# Altium PCB 3400_PCB_V1.PcbDoc
Units mil, origin at the board's own origin, x right, y up, seen from the top; angles counter-clockwise.
Board outline 4250 x 5250 mil, 2 copper layers (Top Layer, Bottom Layer); 76 components, 56 nets, 212 pads, 34 vias.
Unrouted connection lines stored in the file: 28.
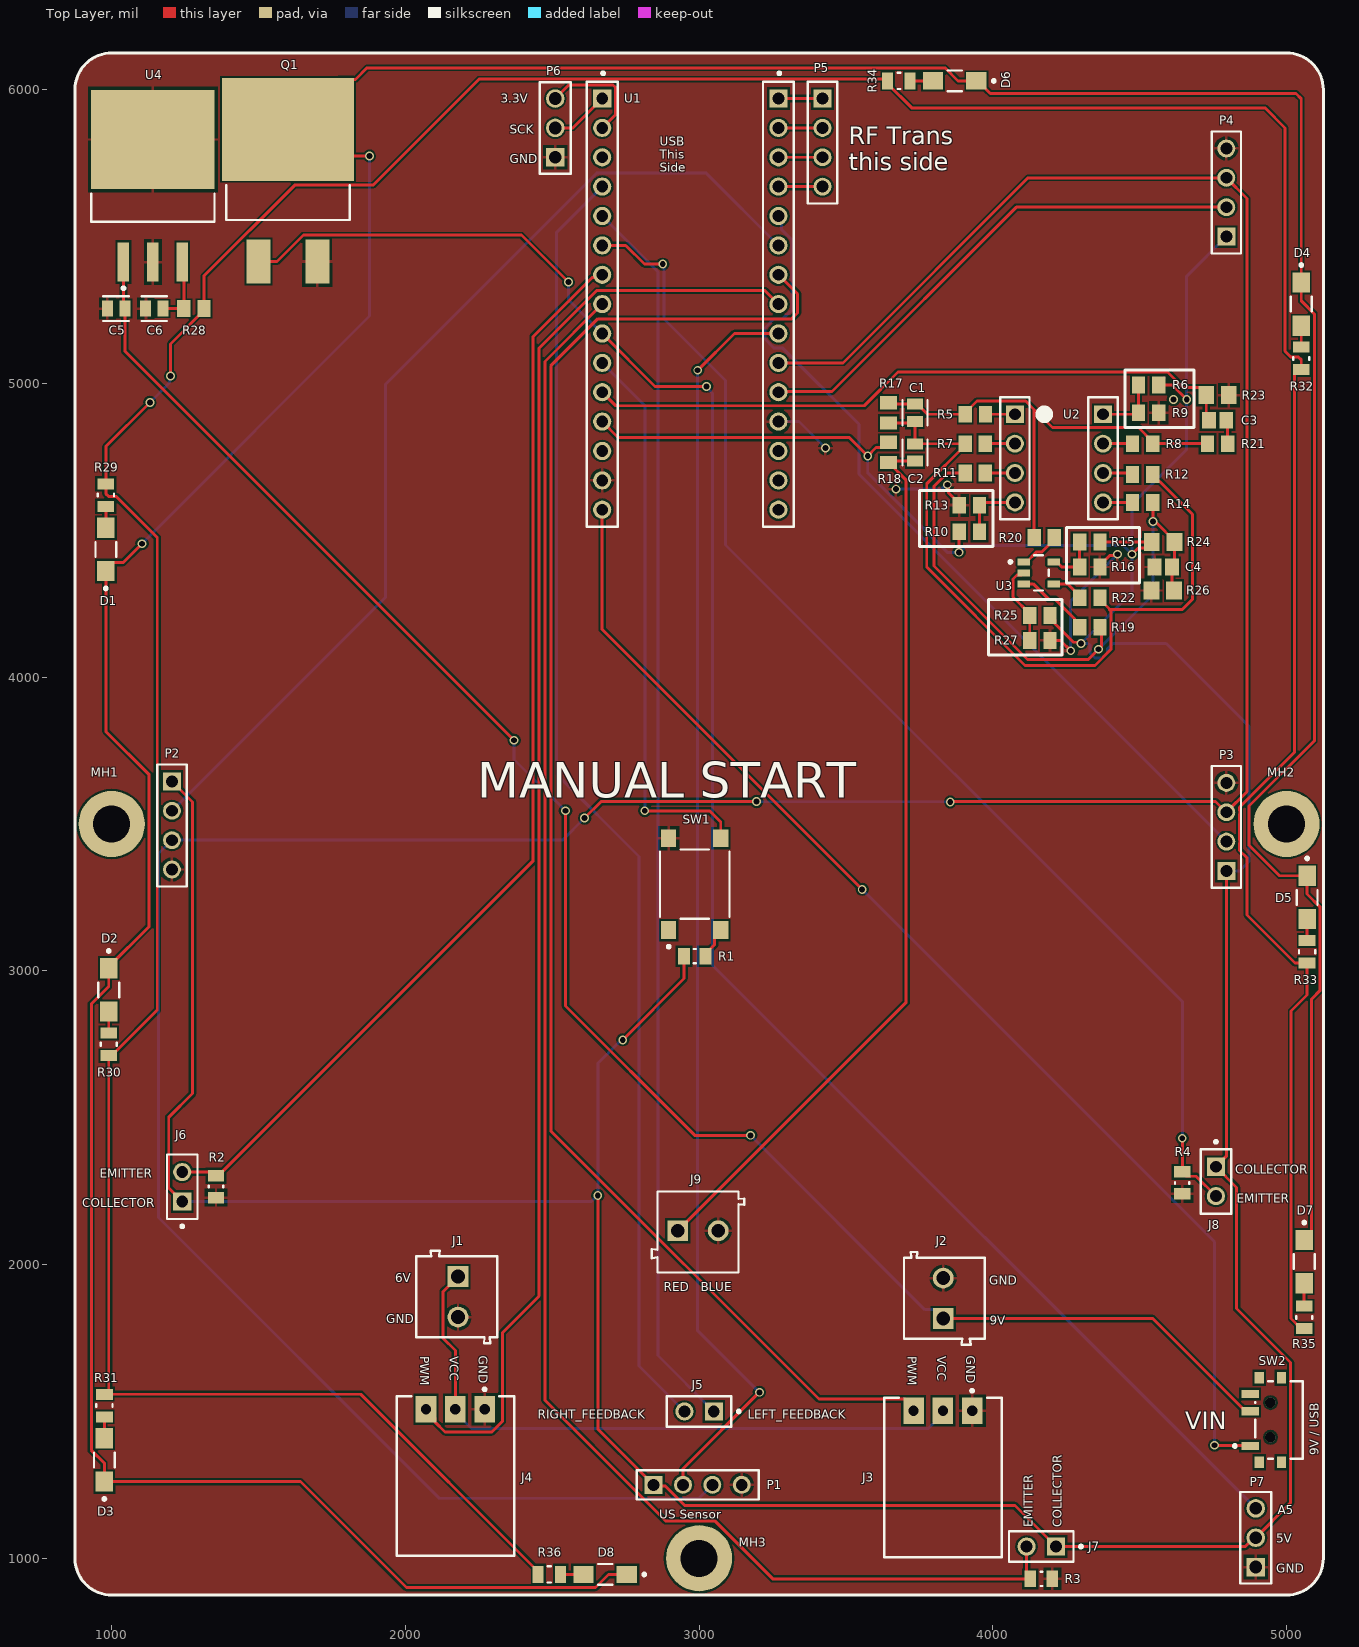
[diagram p0: Top Layer view]
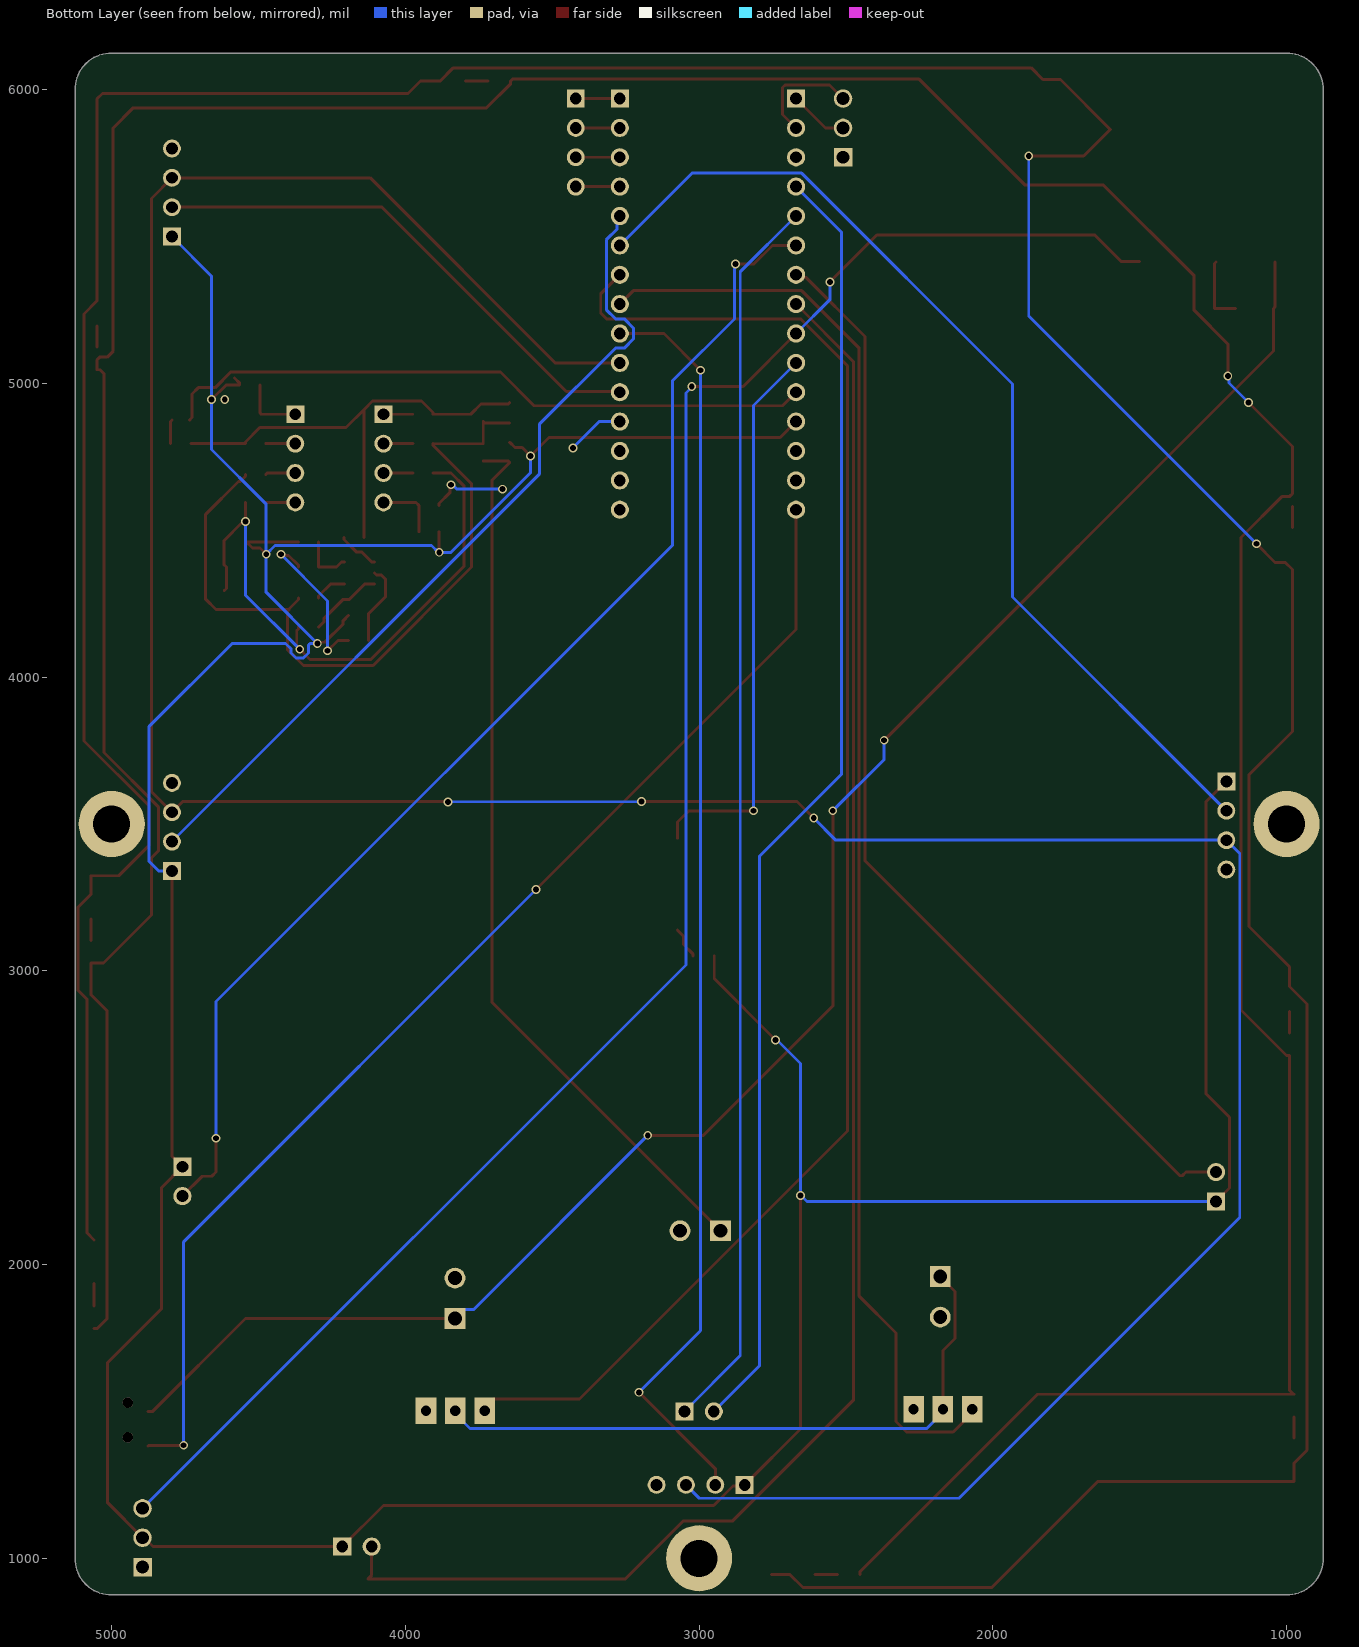
[diagram p1: Bottom Layer view, seen from below]

## Layer stack, top to bottom
Top Solder: solder mask 0.4, Solder Resist, Dk 3.5
Top Layer: signal copper 1.4
Dielectric 1: dielectric 12.6, FR-4, Dk 4.8
Bottom Layer: signal copper 1.4
Bottom Solder: solder mask 0.4, Solder Resist, Dk 3.5

## Board outline
875,1000 875,6000 cw(c1000,6000) 1000,6125 5000,6125 cw(c5000,6000) 5125,6000 5125,1000 cw(c5000,1000) 5000,875 1000,875 cw(c1000,1000)

## Design rules (kind name [scope] priority, off if disabled: settings)
Clearance [All] p1: gap=7 ignorepadtopadclearanceinfootprint=FALSE except(0: Arc-Hole Track-Hole SMDPad-Hole THPad-Hole Via-Hole Fill-Hole Poly-Hole Region-Hole Text-Hole)
HoleSize [All] p1 off: absolutevalues=TRUE maxlimit=100 minlimit=1 maxpercent=80.000 minpercent=20.000
MinimumSolderMaskSliver [All] p1 off: minsoldermaskwidth=10
PolygonConnect [All] p1: connectstyle=Relief reliefconductorwidth=10 reliefentries=4 polygonreliefangle="90 Angle" airgapwidth=10
RoutingVias [All] p1: holewidth=28 width=50 viastyle="Through Hole" minholewidth=28 minwidth=50 maxholewidth=28 maxwidth=50
SilkToSolderMaskClearance [IsPad] p1: minsilkscreentomaskgap=7 clearancetoexposedcopper=TRUE
SolderMaskExpansion [All] p1: expansion=4 istentingtop=FALSE
Width [All] p1: maxlimit=10 minlimit=10 preferedwidth=10
27 further rules are at their usual default settings.

## Classes and differential pairs
component class mic: C1 C2 C3 C4 R5 R6 R7 R8 R9 R10 R11 R12 R13 R14 R15 R16 R17 R18 R19 R20 R21 R22 R23 R24 R25 R26 R27 U2 U3
component class leds: C5 C6 D1 D2 D3 D4 D5 D6 D7 D8 Q1 R28 R29 R30 R31 R32 R33 R34 R35 R36 U4
component class ic: MH1 MH2 MH3 R1 SW1 U1
component class headers: "9V / USB" J1 J2 J3 J4 J5 J6 J7 J8 J9 P1 P2 P3 P4 P5 P6 P7 R2 R3 R4

## Components (designator, comment, footprint, x,y, rotation, side; value= is the part's Value field where it differs from the comment)
C1 "100pF" FP-C0805C-DN-MFG 3735,4900 r90 top value="100 pF"
C2 "0.22uF" FP-C0805C-DN-MFG 3735,4765 r90 top value="0.22 μF"
C3 "2.2uF" CAPC2113X140X50LL30T25 4765,4875 r0 top
C4 "2.2uF" CAPC2113X140X50LL30T25 4580,4375 r0 top
C5 "0.33uF" FP-C0805C-DN-MFG 1015,5255 r180 top value="0.33 μF"
C6 "0.1uF" FP-C0805C-DN-MFG 1145,5255 r180 top value="0.10 μF"
D1 "POWER_LED" FP-APTD3216CGCK-MFG 980,4435 r90 top value="Green LED"
D2 "POWER_LED" FP-APTD3216CGCK-MFG 990,2935 r270 top value="Green LED"
D3 "POWER_LED" FP-APTD3216CGCK-MFG 975,1335 r90 top value="Green LED"
D4 "POWER_LED" FP-APTD3216CGCK-MFG 5050,5270 r270 top value="Green LED"
D5 "POWER_LED" FP-APTD3216CGCK-MFG 5070,3250 r270 top value="Green LED"
D6 "POWER_LED" FP-APTD3216CGCK-MFG 3870,6030 r180 top value="Green LED"
D7 "POWER_LED" FP-APTD3216CGCK-MFG 5060,2010 r270 top value="Green LED"
D8 "POWER_LED" FP-APTD3216CGCK-MFG 2680,945 r180 top value="Green LED"
J1 "6V Battery" 691103110002 2175,1890 r270 top
J2 "9V Battery" 691103110002 3835,1885 r90 top
J3 "L Motor" FP-5-104935-3-MFG 3830,1275 r0 top
J4 "R Motor" FP-5-104935-3-MFG 2170,1280 r0 top
J5 "Motor Feedback" FP-M20-9990246-MFG 3000,1500 r180 top
J6 "Left Phototransistor" FP-M20-9990246-MFG 1240,2265 r90 top
J7 "Front Phototransistor" FP-M20-9990246-MFG 4165,1040 r180 top
J8 "Right Phototransistor" FP-M20-9990246-MFG 4759.49,2283.01 r270 top
J9 "Microphone" 691103110002 2996.1,2111.06 r0 top
MH1 "M3" PTH_M3 1000,3500 r0 top
MH2 "M3" PTH_M3 5000,3500 r0 top
MH3 "M3" PTH_M3 3000,1000 r0 top
P1 "Front Ultrasonic" SMTC-TSW-104-08-X-S 2845,1250 r0 top
P2 "Right Ultrasonic" SMTC-TSW-104-08-X-S 1205,3645 r270 top
P3 "Left Ultrasonic 1" SMTC-TSW-104-08-X-S 4795,3340 r90 top
P4 "Left Ultrasonic 2" SMTC-TSW-104-08-X-S 4795,5500 r90 top
P5 "RF Transceiver" SMTC-TSW-104-08-X-S 3420,5970 r270 top
P6 "RF Wires" 61300311121 2510,5870 r90 top
P7 "Extra Pins" 61300311121 4895,1070 r90 top
Q1 "IRF530NSTRLPBF" FP-PG-TO263-3-MFG 1600,5746.4 r0 top
R1 "1k" RESC2013X50X30NL20T20 2985,3050 r180 top
R2 "2.2k" FP-CRCW0805-e3-IPC_B 1355,2265 r90 top
R3 "2.2k" FP-CRCW0805-e3-IPC_B 4165,930 r180 top
R4 "2.2k" FP-CRCW0805-e3-IPC_B 4644.49,2278.01 r90 top
R5 "Jumper" RESC2013X70X40NL20T20 3940.55,4895 r0 top
R6 "Jumper" RESC2013X70X40NL20T20 4530,4995 r0 top
R7 "Jumper" RESC2013X70X40NL20T20 3940,4795 r0 top
R8 "Jumper" RESC2013X70X40NL20T20 4510,4795 r0 top
R9 "Jumper" RESC2013X70X40NL20T20 4530,4900 r0 top
R10 "Jumper" RESC2013X70X40NL20T20 3920,4495 r0 top
R11 "Jumper" RESC2013X70X40NL20T20 3940,4695 r0 top
R12 "Jumper" RESC2013X70X40NL20T20 4510,4690 r0 top
R13 "Jumper" RESC2013X70X40NL20T20 3920,4585 r0 top
R14 "Jumper" RESC2013X70X40NL20T20 4510,4595 r0 top
R15 "Jumper" RESC2013X70X40NL20T20 4330,4460 r180 top
R16 "Jumper" RESC2013X70X40NL20T20 4330,4375 r0 top
R17 "75k" RESC2013X70X40NL20T20 3645,4900 r270 top
R18 "4.02k" RESC2013X70X40NL20T20 3645,4765 r90 top
R19 "Jumper" RESC2013X70X40NL20T20 4330,4170 r180 top
R20 "Jumper" RESC2013X70X40NL20T20 4175,4475 r180 top
R21 "49.9" RESC2013X70X40NL20T20 4765,4795 r180 top
R22 "Jumper" RESC2013X70X40NL20T20 4330,4270 r180 top
R23 "100k" RESC2013X70X40ML20T20 4765,4960 r180 top
R24 "100k" RESC2013X70X40ML20T20 4580,4460 r180 top
R25 "Jumper" RESC2013X70X40NL20T20 4160,4210 r180 top
R26 "100k" RESC2013X70X40ML20T20 4578.39,4295 r0 top
R27 "Jumper" RESC2013X70X40NL20T20 4160,4125 r0 top
R28 "Jumper" RESC2013X70X40NL20T20 1280,5255 r0 top
R29 "220" FP-CRCW0805-e3-MFG 980,4620 r90 top
R30 "220" FP-CRCW0805-e3-MFG 990,2750 r270 top
R31 "220" FP-CRCW0805-e3-MFG 975,1520 r90 top
R32 "220" FP-CRCW0805-e3-MFG 5050,5085 r270 top
R33 "220" FP-CRCW0805-e3-MFG 5070,3065 r270 top
R34 "220" FP-CRCW0805-e3-MFG 3680,6030 r180 top
R35 "220" FP-CRCW0805-e3-MFG 5060,1820 r270 top
R36 "220" FP-CRCW0805-e3-MFG 2490,945 r180 top
SW1 "Manual Start Button" FP-PTS645SM43SMTR92LFS-MFG 2985,3295 r90 top
SW2 "VIN Power Toggle" FP-PCM12SMTR-MFG 4974.53,1470.94 r90 top
U1 "Arduino Nano Every" "Arduino Nano" 2670,5270 r90 top
U2 "Op Amp" "Op Amp" 4375,4895 r270 top
U3 "Op Amp" FP-DBV0005A-MFG 4156.18,4355 r0 top
U4 "5V Regulator" FP-KTT0003A-MFG 1140,5740 r0 top

## Footprints (in the part's own frame and the unit in brackets; to place one, negate y for a bottom-side part, rotate by r counter-clockwise, add the part's x,y. Pads: shape width x height; smd on the part's side, far side on the other; paste and mask are expansions set on the pad)
61300311121 [mm] "Pin Header, pitch 2.54 mm, THT, Vertical, single row, 3p"
  rect 1.6x1.6 hole 1.1: 1(-2.54,0)
  round 1.6 hole 1.1: 2(0,0) 3(2.54,0)
  silkscreen extent -3.96,-1.35 3.96,1.35, body extent -3.81,-1.27 3.81,1.27, height 8.57
691103110002 [mm] "3,50mm - modular - blue - Horizontal wire entry - Pressure clamp - 8,4mm height - 02p"
  rect 1.8x1.8 hole 1.2: 1(-1.75,0.1)
  round 1.8 hole 1.2: 2(1.75,0.1)
  silkscreen extent -4,-3.5 4,3.5, body extent -4,-3.5 4,3.5, height 8.45
"Arduino Nano" [mm]
  rect 1.57x1.57 hole 1.02 paste-1000 mask+0: 1(17.78,0) 16(17.78,-15.24)
  round 1.57 hole 1.02 paste-1000 mask+0: 2(15.24,0) 3(12.7,0) 4(10.16,0) 5(7.62,0) 6(5.08,0) 7(2.54,0) 8(0,0) 9(-2.54,0) 10(-5.08,0) 11(-7.62,0) 12(-10.16,0) 13(-12.7,0) 14(-15.24,0) 15(-17.78,0) 17(15.24,-15.24) 18(12.7,-15.24) 19(10.16,-15.24) 20(7.62,-15.24) 21(5.08,-15.24) 22(2.54,-15.24) 23(0,-15.24) 24(-2.54,-15.24) 25(-5.08,-15.24) 26(-7.62,-15.24) 27(-10.16,-15.24) 28(-12.7,-15.24) 29(-15.24,-15.24) 30(-17.78,-15.24)
  silkscreen extent -19.24,-16.58 20.08,1.34, body extent -19.34,-16.68 19.34,1.44, height 0.25
CAPC2113X140X50LL30T25 [mm] "Chip Capacitor, 2-Leads, Body 2.10x1.25mm, IPC High Density"
  rect 1.2x1.45 smd: 1(-0.75,0) 2(0.75,0)
  body extent -1.2,-0.77 1.2,0.77, height 1.4
FP-5-104935-3-MFG [mm]
  rect 1.78x2.29 hole 0.89 paste-1000 mask+0: 1(2.54,5.775) 2(0,5.775) 3(-2.54,5.775)
  silkscreen extent -5.08,-6.9 5.08,7.62, body extent -5.18,-6.99 5.18,7.02, height 0.25
FP-APTD3216CGCK-MFG [mm]
  rect 1.75x1.5 smd paste+0 mask+0: 1(-1.875,0) 2(1.875,0)
  silkscreen extent -3.5,-0.9 0.63,0.9, body extent -2.85,-1 2.85,1, height 0.25
FP-C0805C-DN-MFG [mm]
  rect 0.95x1.35 smd paste+0 mask+0: 1(-0.75,0) 2(0.75,0)
  silkscreen extent -1.1,-1.07 1.1,1.07, body extent -1.4,-0.85 1.4,0.85, height 0.25
FP-CRCW0805-e3-IPC_B [mil]
  rect 39.63x55.44 smd paste+0 mask+0: 1(-37.44,0) 2(37.44,0)
  silkscreen extent -3,-25 3,25, body extent -67,-38 67,38, height 10
FP-CRCW0805-e3-MFG [mm]
  rect 0.95x1.45 smd paste+0 mask+0: 1(-0.975,0) 2(0.975,0)
  silkscreen extent -0.13,-0.7 0.13,0.7, body extent -1.55,-0.82 1.55,0.82, height 0.25
FP-DBV0005A-MFG [mm]
  rrect17% 1.1x0.6 smd paste+0 mask+0: 1(-1.3,0.95) 2(-1.3,0) 3(-1.3,-0.95) 4(1.3,-0.95) 5(1.3,0.95)
  silkscreen extent -2.57,-1.53 0.87,1.53, body extent -1.95,-1.78 1.95,1.78, height 0.25
FP-KTT0003A-MFG [mm]
  rect 1x3.4 smd paste-1000 mask+0: 1(-2.54,-8.303) 2(0,-8.303) 3(2.54,-8.303)
  rect 10.7x8.6 smd paste-1000 mask+0: 4(0,2.298)
  silkscreen extent -5.34,-10.69 5.34,-2.38, body extent -5.45,-10.1 5.45,6.7, height 0.25
FP-M20-9990246-MFG [mm]
  rect 1.57x1.57 hole 1.02 paste-1000 mask+0: 1(-1.27,0)
  round 1.57 hole 1.02 paste-1000 mask+0: 2(1.27,0)
  silkscreen extent -3.55,-1.32 2.79,1.32, body extent -2.89,-1.42 2.89,1.42, height 0.25
FP-PCM12SMTR-MFG [mm]
  rect 0.7x1.5 smd paste+0 mask+0: 1(-2.25,2.5) 2(0.75,2.5) 3(2.25,2.5)
  rect 1x0.8 smd paste+0 mask+0: 4(-3.65,1.715) 5(3.65,1.715) 6(-3.65,-0.215) 7(3.65,-0.215)
  round 0.9 hole 0.9 unplated paste-1000 mask+0: ""(-1.5,0.75) ""(1.5,0.75)
  silkscreen extent -3.35,-2.05 3.35,3.95, body extent -4.25,-2.15 4.25,3.35, height 0.25
FP-PG-TO263-3-MFG [mm]
  rect 2.08x3.81 smd paste+0 mask+0: 1(-2.54,-8.417) 3(2.54,-8.417)
  rect 11.43x8.89 smd paste+0 mask+0: 4(0,3.013)
  silkscreen extent -5.34,-4.82 5.34,-1.81, body extent -5.81,-10.42 5.81,7.56, height 0.25
FP-PTS645SM43SMTR92LFS-MFG [mm]
  rect 1.55x1.3 smd paste+0 mask+0: 1(-3.975,2.25) 2(3.975,2.25) 3(-3.975,-2.25) 4(3.975,-2.25)
  silkscreen extent -5.52,-3 3,3, body extent -4.85,-3.1 4.85,3.1, height 0.25
"Op Amp" [mm] ".025 SQ Post Terminal Strip Assembly, 1x4 Pins, Vertical, 2.54mm Pitch, Male"
  rect 1.55x1.55 hole 1.02: 1(0,-7.62) 5(0,0)
  round 1.55 hole 1.02: 2(2.54,-7.62) 3(5.08,-7.62) 4(7.62,-7.62) 6(2.54,0) 7(5.08,0) 8(7.62,0)
  silkscreen extent -1.46,-8.89 9.08,1.27, body extent -1.27,-8.89 8.89,1.27, height 8.38
PTH_M3 [mm] "Plated Through Hole, M3"
  round 5.715 hole 3.2 paste+0: ""(0,0)
RESC2013X50X30NL20T20 [mm] "Chip Resistor, 2-Leads, Body 2.00x1.25mm, IPC Medium Density"
  rect 1.05x1.45 smd: 1(-0.925,0) 2(0.925,0)
  silkscreen extent -0.1,-0.63 0.1,0.63, body extent -1.1,-0.72 1.1,0.72, height 0.5
RESC2013X70X40ML20T20 [mm] "Chip Resistor, 2-Leads, Body 2.00x1.25mm, IPC Low Density"
  rect 1.35x1.55 smd: 1(-0.975,0) 2(0.975,0)
  body extent -1.1,-0.72 1.1,0.72, height 0.7
RESC2013X70X40NL20T20 [mm] "Chip Resistor, 2-Leads, Body 2.00x1.25mm, IPC Medium Density"
  rect 1.15x1.45 smd: 1(-0.875,0) 2(0.875,0)
  body extent -1.1,-0.72 1.1,0.72, height 0.7
SMTC-TSW-104-08-X-S [mm] ".025 SQ Post Terminal Strip Assembly, 1x4 Pins, Vertical, 2.54mm Pitch, Male"
  rect 1.55x1.55 hole 1.02: 1(0,0)
  round 1.55 hole 1.02: 2(2.54,0) 3(5.08,0) 4(7.62,0)
  silkscreen extent -1.46,-1.27 9.08,1.27, body extent -1.27,-1.27 8.89,1.27, height 8.38

## Part data
C1: library part CMP-03020-013647-1, "CAP CER 100PF 50V C0G/NP0 0805", Capacitance="100 pF", Manufacturer=KEMET, Manufacturer Part Number=C0805C101J5GACTU, Package=C0805C-DN, Temperature="-55°C to +125°C", Temperature Characteristic=C0G, Temperature Coefficient=30ppm/°C, Temperature Range High=+125°C, Temperature Range Low=-55°C, Tolerance=0.05, Voltage Rating="50 V", Automotive=No, Category=Cap, ComponentLink2Description=Datasheet, ComponentLink2URL=https://content.kemet.com/datasheets/KEM_C1003_C0G_SMD.pdf, Device Class L1="Passive Components", Device Class L2=Capacitors, Device Class L3="Ceramic Capacitors", Digikey Description="CAP CER 100PF 50V C0G/NP0 0805", Height=0.88mm, Ipc Land Pattern Name=CAPC200125X78, Lead Free=Yes, Material=Ceramic, MPN=C0805C101J5GACTU, Octopart=https://octopart.com/c0805c101j5gactu-kemet-100795, RoHS=TRUE
C2: library part CMP-1036-04552-2, "CAP CER 0.22UF 50V X7R 0805", Capacitance="0.22 μF", Manufacturer=KEMET, Manufacturer Part Number=C0805C224K5RACTU, Package=C0805C-DN, Temperature="-55°C to +125°C", Temperature Characteristic=X7R, Temperature Coefficient=30ppm/°C, Temperature Range High=+125°C, Temperature Range Low=-55°C, Tolerance=0.1, Voltage Rating="50 V", Automotive=No, Category=Cap, ComponentLink2Description=Datasheet, ComponentLink2URL=https://content.kemet.com/datasheets/KEM_C1003_C0G_SMD.pdf, Device Class L1="Passive Components", Device Class L2=Capacitors, Device Class L3="Ceramic Capacitors", Digikey Description="CAP CER 0.22UF 50V X7R 0805", Height=0.88mm, Ipc Land Pattern Name=CAPC200125X78, Lead Free=Yes, Material=Ceramic, Mouser Description="CAP CER 0.22UF 50V X7R 0805", MPN=C0805C224K5RACTU, Octopart=https://octopart.com/c0805c224k5ractu-kemet-144670, RoHS=TRUE
C3 C4: library part CMP-2007-00007-1, Manufacturer=Kemet, MPN=C0805C225K8RACTU, Part Number=C0805C225K8RACTU
C5: library part CMP-1036-04607-3, "CAP CER 0.33UF 50V X7R 0805", Capacitance="0.33 μF", Manufacturer=KEMET, Manufacturer Part Number=C0805C334K5RACTU, Package=C0805C-DN, Temperature="-55°C to +125°C", Temperature Characteristic=X7R, Temperature Coefficient=30ppm/°C, Temperature Range High=+125°C, Temperature Range Low=-55°C, Tolerance=0.1, Voltage Rating="50 V", Automotive=No, Category=Cap, ComponentLink2Description=Datasheet, ComponentLink2URL=https://content.kemet.com/datasheets/KEM_C1003_C0G_SMD.pdf, Device Class L1="Passive Components", Device Class L2=Capacitors, Device Class L3="Ceramic Capacitors", Digikey Description="CAP CER 0.33UF 50V X7R 0805", Height=0.88mm, Ipc Land Pattern Name=CAPC200125X78, Lead Free=Yes, Material=Ceramic, Mouser Description="Multilayer Ceramic Capacitors MLCC - SMD/SMT 50volts 0.33uF 10% X7R", MPN=C0805C334K5RACTU, Octopart=https://octopart.com/c0805c334k5ractu-kemet-10475704, RoHS=TRUE
C6: library part CMP-2007-00279-2, "CAP CER 0.1UF 50V X7R 0805", Capacitance="0.10 μF", Manufacturer=KEMET, Manufacturer Part Number=C0805C104K5RACTU, Package=C0805C-DN, Temperature="-55°C to +125°C", Temperature Characteristic=X7R, Temperature Coefficient=30ppm/°C, Temperature Range High=+125°C, Temperature Range Low=-55°C, Tolerance=0.1, Voltage Rating="50 V", Automotive=No, Category=Cap, ComponentLink2Description=Datasheet, ComponentLink2URL=https://content.kemet.com/datasheets/KEM_C1003_C0G_SMD.pdf, Device Class L1="Passive Components", Device Class L2=Capacitors, Device Class L3="Ceramic Capacitors", Digikey Description="CAP CER 0.1UF 50V X7R 0805", Height=0.88mm, Ipc Land Pattern Name=CAPC200125X78, Lead Free=Yes, Material=Ceramic, Mouser Description="Cap Ceramic 0.1uF 50V X7R 10% SMD 2.0 x 1.2 mm 125 C Paper T/R", MPN=C0805C104K5RACTU, Octopart=https://octopart.com/c0805c104k5ractu-kemet-143926, RoHS=TRUE
D1 D2 D3 D4 D5 D6 D7 D8: library part CMP-2000-05792-2, "LED GREEN CLEAR 2SMD", Case Code (Imperial)=1206, Case Code (Metric)=3216, Color=Green, Forward Current=20mA, Forward Voltage=2.1V, Lens Color=Clear, Max Operating Temperature=85°C, Min Operating Temperature=-40°C, MPN=APTD3216CGCK, Package Quantity=2000, Case/Package=1206, Dominant Wavelength=570nm, Height=1.8mm, Illumination Color=Green, Lead Free="Lead Free", Length=3.2mm, Lens Style=Clear, Luminous Intensity=300mcd, Mount="Surface Mount", Number of LEDs=1, Number of Pins=2, Packaging="Tape and Reel", Test Current=20mA, Viewing Angle=50°, Width=1.6mm
J1 J2 J9: library part CMP-1502-03254-1, "Series 1031 - 3.50 mm Horizontal Entry Modular with Pressure Clamp WR-TBL, 2 pin", Manufacturer="Wurth Elektronik", MPN=691103110002, Operating Temperature=-40to105degC, Datasheet URL=http://katalog.we-online.de/em/datasheet/6911031100xx.pdf, Manufacturer URL=http://www.we-online.de, Mounting Technology=THT, Package Reference=691103110002, Packaging=Box, Part Number=691103110002, Pin Number=2, Pitch=3.50mm, Publisher=WurthElektronik
J3 J4: library part CMP-03369-000121-1, "CONN HEADER R/A 3POS 2.54MM", Color=Black, Contact Current Rating=3A, Contact Resistance=15mR, Flammability Rating="UL94 V-0", Insulation Resistance=5GR, Max Operating Temperature=105°C, Max Voltage Rating (AC)=30V, Min Operating Temperature=-65°C, MPN=5-104935-3, Package Quantity=52, Approvals=CSA, Backwall/Post Interruptions="No (Without)", Connector Type=Plug, Contact Gender=Male, Contact Material=Brass, Contact Mating Length=0.23inch, Contact Plating=Gold, Contact Retention="Yes (With)", Contact Shape=Square, Contact Type="Male Pin", Current Rating=3A, Depth=13.59mm, ELV=Compliant, Gender=Male, Height=13.59mm, Housing Color=Black, Housing Material=Thermoplastic, Lead Free="Lead Free", Length=0.4inch, Mating Alignment="Yes (With)", Mating Retention="Yes (With)", Mount="Through Hole", Number of Contacts=3, Number of Positions=3, Number of Rows=1, Orientation="Right Angle", Packaging=Rail/Tube, PCB Mount Alignment="No (Without)", PCB Mount Retention=Without, PCB Mounting Orientation="Right Angle", PCB Thickness=0.062inch, Pitch=2.54mm, Radiation Hardening=No, RoHS Compliant=Yes, Row Spacing=0.1inch, Series="AMPMODU MTE", Strain Relief="No (Without)", Tail Length=3.3mm, Termination=Crimp
J5 J6 J7 J8: library part CMP-15831-000009-1, "CONN HEADER VERT 2POS 2.54MM", Current Rating=3A, Manufacturer=Harwin, Manufacturer Part Number=M20-9990246, Temperature="-40°C to +105°C", Temperature Range High=+105°C, Temperature Range Low=-40°C, Automotive=No, Category=Conn, ComponentLink2Description=Datasheet, ComponentLink2URL=https://cdn.harwin.com/pdfs/M20-999.pdf, Conn Gender=Male, Conn Orientation=Vertical, Contact Material=Tin,Nickel, Device Class L1=Connectors, Device Class L2="Headers and Wire Housings", Device Class L3=unset, Digikey Description="CONN HEADER VERT 2POS 2.54MM", Height=8.99mm, Lead Free=Yes, Mouser Description="2.54mm (0.1\") Pitch SIL Vertical PC Tail Pin Header, 6.1mm mating pin height, tin, 2 contacts", Number of Contacts=2, Number of Rows=1, Octopart=https://octopart.com/m20-9990246-harwin-2590635, Package=M20-9990246, Pitch=2.54mm, RoHS=TRUE
MH1 MH2 MH3: library part PTH, "M3 Plated Through Hole"
P1 P2 P3 P4 P5: library part CMP-1024-00355-1, "0.025\" SQ Post Header, Through-hole, Vertical, -55 to 125 degC, 2.54 mm Pitch, 4-Pin, Male, RoHS", Manufacturer=Samtec, PartNumber=TSW-104-08-F-S, Temperature Range="-55 to 125 degC", ComponentLink1Description="Manufacturer URL", ComponentLink1URL=http://www.samtec.com, ComponentLink2Description=Datasheet, ComponentLink2URL=http://www.samtec.com/documents/webfiles/pdf/TSW_TH.PDF, ComponentLink3Description="Package Specification", ComponentLink3URL=http://www.samtec.com/documents/webfiles/cpdf/TSW-XXX-XX-XXX-X-XX-XXX-MKT.pdf, DatasheetVersion=F-214, Mounting Technology=Through-hole, Orientation=Vertical, PackageDescription=".025[0.64] SQ. Post Terminal Strip Assembly", PackageReference=TSW-104-08-X-S, PackageVersion="DM, 8/1988", Pitch="2.54 mm", RoHS=True
P6 P7: library part CMP-1502-01062-1, "THT Vertical Pin Header WR-PHD, Pitch 2.54 mm, Single Row, 3 pins", Contact Resistance=20mOhm, Manufacturer="Wurth Elektronik", Operating Temperature=-40to105degC, Package Reference=61300311121, Rated Current=3A, Withstanding Voltage=500VAC, Working Voltage=250VAC, Datasheet URL=https://katalog.we-online.de/em/datasheet/6130xx11121.pdf, Gender=Male, Manufacturer URL=http://www.we-online.de, Mounting Technology=THT, Orientation=Vertical, Packaging=Bag, Part Number=61300311121, Pin Number=3, Pitch=2.54mm, Publisher=WurthElektronik, Row Number=Single
Q1: library part CMP-32901-000039-1, "MOSFET N-CH 100V 17A D2PAK", Continuous Drain Current=17A, Drain To Source Breakdown Voltage=100V, Drain To Source Resistance=90mΩ, Gate To Source Voltage=20V, Input Capacitace At Vds="920pF @ 25V", Manufacturer=Infineon, Max Forward Diode Voltage=1.3V, Max Junction Temp=+175°C, Package=PG-TO263-3, Power Dissipation=3.8W, Pulse Drain Current=60A, Temperature="-55°C to +175°C", Temperature Range Low=-55°C, Automotive=No, Category=Trans, ComponentLink2Description=Datasheet, ComponentLink2URL=https://www.infineon.com/dgdl/irf530nspbf.pdf?fileId=5546d462533600a4015355e38eb4199c, Depletion Mode=False, Device Class L1="Discrete Semiconductors", Device Class L2=Transistors, Device Class L3=MOSFETs, Digikey Description="MOSFET N-CH 100V 17A D2PAK", Drain To Source Voltage=100V, Footprint Url=https://www.infineon.com/cms/en/product/packages/PG-TO263/PG-TO263-3-901/, Gate Charge At Vgs="37nC @ 10V", Height=5.084mm, Lead Free=Yes, Manufacturer Part Number=IRF530NSTRLPBF, Number Of Channels=1, Number Of N Channels=1, Octopart=https://octopart.com/irf530nstrlpbf-infineon-65873402, Reverse Recovery Charge=320nC, Reverse Recovery Time=93ns, RoHS=TRUE, Rthja Max=40°C/W, Standoff Height=0mm, Temperature Range High=+175°C, Threshold Vgs Max=4V, Threshold Vgs Min=2V, Turn Off Delay Time=35ns, Turn On Delay Time=9.2ns
R1: library part CMP-1013-00510-2, Manufacturer="Vishay Dale", MPN=CRCW08051K00FKEA, Part Number=CRCW08051K00FKEA
R2 R3 R4: library part CMP-2001-03760-2, "RES Thick Film, 2.2kΩ, 1%, 0.125W, 100ppm/°C, 0805", Case Code (Imperial)=0805, Case Code (Metric)=2012, Max Operating Temperature=155°C, Max Power Dissipation=125mW, Min Operating Temperature=-55°C, MPN=CRCW08052K20FKEA, Package Quantity=10, Resistance=2.2kR, Temperature Coefficient=100ppm/°C, Tolerance=1%, Voltage Rating=150V, Case/Package=0805, Composition="Thick Film", Contact Plating=Tin, Depth=1.25mm, Features="Automotive AEC-Q200", Height=0.45mm, Lead Free="Lead Free", Length=2mm, Military Standard=Not, Number of Terminations=2, Packaging="Tape and Reel", Power Rating=125mW, Radiation Hardening=No, Termination=SMD/SMT, Voltage Rating (DC)=150V, Weight=0.000194oz, Width=1.25mm
R5 R6 R7 R8 R9 R10 R11 R12 R13 R14 R15 R16 R19 R20 R22 R25 R27 R28: library part CMP-1665-00002-5, "Chip Resistor, 0 Ohm, +/- 1%, 0.125 W, -55 to 155 degC, 0805 (2012 Metric), RoHS, Tape and Reel", Case Code (Imperial)=0805, Case Code (Metric)=2012, Max Operating Temperature="155 degC", Min Operating Temperature="-55 degC", MPN=ERJ-6GEY0R00V, Package Quantity=5000, Resistance="0 Ohm", Tolerance=5%, Case/Package=0805, ComponentLink1Description="Manufacturer URL", ComponentLink1URL=http://www.panasonic.com/, ComponentLink2Description=Datasheet, ComponentLink2URL=http://industrial.panasonic.com/cdbs/www-data/pdf/RDA0000/AOA0000C84.pdf, DatasheetVersion=03/2015, Height="0.6 mm", Length="2 mm", Mounting Technology="Surface Mount", PackageDescription="2-Pin Surface Mount Device, Body 2 x 1.25 mm", Packaging="Tape and Reel", PartNumber=ERJ-6GEY0R00V, Radiation Hardening=No, REACH SVHC="No SVHC", RoHSCompliant=True, Width="1.25 mm"
R17: library part CMP-2001-00290-1, Manufacturer=Panasonic, MPN=ERJ-6ENF7502V, Part Number=ERJ-6ENF7502V
R18: library part CMP-2001-00168-1, Manufacturer=Panasonic, MPN=ERJ-6ENF4021V, Part Number=ERJ-6ENF4021V
R21: library part CMP-2001-00215-1, Manufacturer=Panasonic, MPN=ERJ-6ENF49R9V, Part Number=ERJ-6ENF49R9V
R23 R24 R26: library part CMP-2001-04377-1, Manufacturer=Panasonic, MPN=ERJ-6ENF1003V, Part Number=ERJ-6ENF1003V
R29 R30 R31 R32 R33 R34 R35 R36: library part CMP-2001-03682-2, "RES Thick Film, 220Ω, 1%, 0.125W, 100ppm/°C, 0805", Case Code (Imperial)=0805, Case Code (Metric)=2012, Max Operating Temperature=155°C, Max Power Dissipation=125mW, Min Operating Temperature=-55°C, MPN=CRCW0805220RFKEA, Package Quantity=10, Resistance=220R, Temperature Coefficient=100ppm/°C, Tolerance=1%, Voltage Rating=150V, Case/Package=0805, Composition="Thick Film", Contact Plating=Tin, Depth=1.25mm, Features="Automotive AEC-Q200", Height=0.45mm, Lead Free="Lead Free", Length=2mm, Military Standard=Not, Mount="Surface Mount", Number of Terminations=2, Packaging="Tape and Reel", Power Rating=125mW, Radiation Hardening=No, Termination=SMD/SMT, Voltage Rating (DC)=150V, Weight=0.000194oz, Width=0.049inch
SW1: library part CMP-2000-05160-2, "SWITCH TACTILE SPST-NO 0.05A 12V", Case/Package=SMD/SMT, Color=Black, Contact Resistance=100mR, Current Rating=50mA, Max Operating Temperature=60°C, Max Voltage Rating (DC)=12V, Min Operating Temperature=-20°C, MPN=PTS645SM43SMTR92LFS, Operating Force=160gf, Package Quantity=1, Actuator Length=0.85mm, Actuator Material=Nylon, Actuator Type=Standard, Contact Material=Silver, Contact Plating=Silver, Depth=9mm, Illumination Type=Non-Illuminated, Lead Free="Lead Free", Length=6mm, Max Current Rating=50mA, Mechanical Life=100000Cycles, Mount="Surface Mount", Orientation=Straight, Packaging="Tape and Reel", REACH SVHC="No SVHC", Switch Function=Off-Mom, Termination="Gull Wing", Throw Configuration=SPST, Voltage Rating (DC)=12V
SW2: library part CMP-2000-06884-2, "SWITCH SLIDE SPDT 300MA 6V", Contact Current Rating=300mA, Contact Resistance=70mR, Insulation Resistance=100mR, Max Operating Temperature=85°C, Max Voltage Rating (DC)=6V, Min Operating Temperature=-20°C, MPN=PCM12SMTR, Package Quantity=1, Actuator Length=1.5mm, Actuator Material=Nylon, Actuator Type=Standard, Contact Material="Copper Alloy", Contact Plating=Silver, Current Rating=300mA, Depth=5mm, Lead Free="Lead Free", Length=7.7mm, Max Current Rating=300mA, Mechanical Life=10000Cycles, Mount="Surface Mount", Orientation="Right Angle", Packaging="Tape and Reel", REACH SVHC="No SVHC", Switch Function=On-On, Switch Travel=1.5mm, Termination="Gull Wing", Throw Configuration=SPDT, Voltage Rating (AC)=6V, Voltage Rating (DC)=6V, Width=6.7mm
U1: library part "Arduino Mount"
U3: library part CMP-04893-000008-1, "IC OPAMP GP 1 CIRCUIT SOT23-5", Case/Package=SOT-23-5, Input Bias Current=8pA, Input Offset Voltage (Vos)=200uV, Max Dual Supply Voltage=18V, Max Operating Temperature=125°C, Max Supply Voltage=36V, Min Dual Supply Voltage=2.25V, Min Operating Temperature=-40°C, Min Supply Voltage=4.5V, MPN=OPA172IDBVT, Operating Supply Current=1.6mA, Output Current per Channel=75mA, Voltage Gain=130dB, Bandwidth=10MHz, Common Mode Rejection Ratio=90dB, Gain Bandwidth Product=10MHz, Lead Free="Lead Free", Mount="Surface Mount", Number of Amplifiers=1, Number Of Channels=1, Number of Circuits=1, Number of Pins=5, Packaging="Cut Tape", REACH SVHC="No SVHC", RoHS Compliant=Yes, Slew Rate=10V/µs
U4: library part CMP-1685-00014-2, "IC REG LIN 5V 1.5A DDPAK/TO263-3", Case/Package=TO-263, Dropout Voltage=2V, Max Input Voltage=25V, Max Operating Temperature=125°C, Max Output Current=1.5A, Max Output Voltage=5.2V, Min Input Voltage=7V, Min Operating Temperature=0°C, Min Output Voltage=4.8V, MPN=UA7805CKTTR, Nominal Output Voltage=5V, Package Quantity=1, Power Rating=15W, Power Supply Rejection Ratio (PSRR)=78dB, Quiescent Current=8mA, Contact Plating=Tin, Height=4.83mm, Lead Free="Lead Free", Length=10.67mm, Mount="Surface Mount", Number of Outputs=1, Number of Pins=3, Number of Regulators=1, Output Current=1.5A, Output Type=Fixed, Output Voltage=5V, Packaging="Tape and Reel", Polarity=Positive, Radiation Hardening=No, REACH SVHC="No SVHC", Weight=0.050897oz, Width=9.65mm

## Via types
v1: diameter 30, hole 20, Top Layer to Bottom Layer, tented both sides, 34 vias

## Nets (pads, with @x,y where several pads share a name; then routed paths per layer and width w, separated by ;. In a path a pad name is that pad's centre, name@x,y a point inside that pad or via, vN(x,y) a via of type N, cw(c..) or ccw(c..) an arc to the next point about the centre after c; other vN are vias at no path point)
+3.3: P6.3 U1.2 | length 384.7
  Top Layer w10: P6.3 2555.91,6015.91 2707.12,6015.91 2715.91,6007.12 2715.91,5915.91 U1.2
+5: J6.1 J7.1 J8.1 P1.1 P2.1 P3.1 P4.1 P7.2 R1.2 R6.2 R10.1 R15.1 R18.2 R24.2 R25.1 U1.12 | length 15187.4
  Top Layer w10: P2.1 1272.07,3577.93 1275,3575 1275,2582.17 1194.09,2501.27 1194.09,2260.91 J6.1 ; v1(2655,2235) 2655,1440 P1.1 2849.02,1245.98 2884.65,1245.98 2950.64,1180 4075,1180 J7.1 4859.24,1040 4889.24,1070 P7.2 5013.74,1188.74 5013.74,1666.26 4830,1850 4830,2262.5 J8.1 4795,2368.52 P3.1 ; U1.12 2724.09,4815.91 3511.37,4815.91 v1(3574.03,4753.24) 3602.6,4781.81 3627.36,4781.81 R18.2 ; v1(2740,2765) 2948.58,2973.58 R1.2 ; v1(3885,4425) 3885,4494.45 R10.1 ; R25.1 4212.09,4192.36 4212.09,4181.07 4274.33,4118.83 4296.17,4118.83 v1(4300,4115) ; R15.1 R24.2 4521.07,4439.46 4495.25,4439.46 v1(4474.03,4418.24) ; R6.2@4582.09,5018.54 4564.45,5000.91 R6.2 4610,4995 v1(4660,4945)
  Bottom Layer w10: J6.1 2632.57,2215 2652.57,2235 v1(2655,2235) 2655,2685 2735,2765 v1(2740,2765) ; v1(3574.03,4753.24) 3574.03,4695.97 3845,4425 v1(3885,4425) 3888.35,4425 3911.6,4448.24 4444.03,4448.24 v1(4474.03,4418.24) ; P3.1 4840,3340 4872.5,3372.5 4872.5,3832.5 4590,4115 4408.28,4115 4390,4096.72 4390,4082.57 4372.43,4065 4347.57,4065 4330,4082.57 4330,4109.14 4327.09,4112.05 ccw(c4320,4105) 4327.05,4112.09 4324.14,4115 v1(4300,4115) 4474.03,4289.03 v1(4474.03,4418.24) ; P4.1 4660,5365 v1(4660,4945) 4660,4774.6 4474.03,4588.64 v1(4474.03,4418.24)
+6: J1.1 J3.2 J4.2 | length 2213.2
  Top Layer w10: J4.2 2170,1707.2 2128.5,1748.7 2128.5,1908.46 J1.1
  Bottom Layer w10: J4.2 2170,1497.32 2225.04,1442.28 3779.96,1442.28 3830,1492.32 J3.2
+9: C5.1 J2.1 SW2.2 U4.1 | length 6059
  Top Layer w10: U4.1 1040,5259.53 C5.1 1044.53,5110.47 v1(2370,3785) ; v1(2545,3545) 2545,2880 2985,2440 v1(3175,2440) ; J2.1 4544.72,1816.1 4860.35,1500.47 SW2.2
  Bottom Layer w10: v1(2370,3785) 2370,3720 v1(2545,3545) ; v1(3175,2440) 3768.46,1846.54 3800.63,1846.54 J2.1
A5: P7.3 Q1.1 U1.9 | length 6405.3
  Top Layer w10: Q1.1 1562.84,5415 1652.84,5505 2395,5505 v1(2555,5345) ; U1.9 2850,4990 v1(3025,4990)
  Bottom Layer w10: v1(2555,5345) 2555,5285 U1.9 ; v1(3025,4990) 3025,4987.57 3045,4967.57 3045,3020 P7.3
D9: P5.4 U1.19 | length 150
  Top Layer w10: U1.19 P5.4
D10: P5.3 U1.18 | length 150
  Top Layer w10: U1.18 P5.3
D11: P5.2 U1.17 | length 150
  Top Layer w10: U1.17 P5.2
D12: P5.1 U1.16 | length 150
  Top Layer w10: U1.16 P5.1
ECHO_FRONT: P1.2 U1.24 | length 4316.5
  Top Layer w10: P1.2 2945,1305 v1(3205,1565) ; v1(2995,5045) 3120,5170 U1.24
  Bottom Layer w10: v1(2995,5045) 2995,1775 v1(3205,1565)
ECHO_LEFT_1: P3.2 U1.20 | length 2872.7
  Bottom Layer w10: U1.20 3279.91,5560.09 3279.91,5525.01 3315.91,5489.01 3315.91,5250.99 3284.92,5220 3255.08,5220 3224.09,5189.01 3224.09,5150.99 3255.08,5120 3284.92,5120 3544.03,4860.89 3544.03,4690.97 P3.2
ECHO_LEFT_2: P4.2 U1.26 | length 1786
  Top Layer w10: U1.26 3272.09,4972.09 3452.09,4972.09 4080,5600 P4.2
ECHO_RIGHT: P2.2 U1.21 | length 3490.7
  Bottom Layer w10: P2.2 1932.87,4272.87 1932.87,4997.79 2650.99,5715.91 3024.09,5715.91 U1.21
GND: C4.1 C5.2 C6.2 J1.2 J2.2 J3.1 J4.1 J9.2 P1.4 P2.4 P3.4 P4.4 P6.1 P7.1 Q1.3 R2.1 R3.1 R4.1 R9.2 R13.1 R16.2 R23.1 R26.1 R27.2 SW1.2 U1.14 U1.27 U4.2 U4.4 | length 1025.4
  Top Layer w10: v1(3845,4655) 3848.83,4651.17 3848.83,4627.63 3885.55,4590.91 R13.1 ; R27.2 4230,4125 v1(4265,4090) ; R16.2 4364.45,4380.91 4397.96,4414.42 4420.21,4414.42 v1(4424.03,4418.24)
  Bottom Layer w10: U1.27 3340,4870 v1(3430,4780) ; v1(3670,4640) 3824.59,4640 3839.59,4655 v1(3845,4655) ; v1(4265,4090) 4265,4259.21 v1(4424.03,4418.24)
L_MOTOR_FEEDBACK: J5.1 U1.5 | length 4227.4
  Bottom Layer w10: U1.5 2860,5380 2860,1690 J5.1
L_MOTOR_PWM: J3.3 U1.22 | length 5311.8
  Top Layer w10: U1.22 3335,5305 3335,5240 3315,5220 2655.08,5220 2495,5059.92 2495,2455.13 3407.68,1542.44 3699.96,1542.44 3730,1512.4 J3.3
LED_GND: D1.1 D2.1 D3.1 D4.1 D5.1 D6.1 D7.1 D8.1 Q1.4 | length 15082.5
  Top Layer w10: v1(1102.82,4454.22) 1039.23,4390.63 1004.53,4390.63 980,4366.1 D1.1 980,3815.24 1127.5,3667.74 1127.5,3151.24 990,3013.74 D2.1 990,2946.37 930.47,2886.84 930.47,1368.16 975,1323.63 D3.1 1642.83,1261.18 2003.54,900.47 2646.84,900.47 2691.37,945 D8.1 ; v1(1877.82,5774.22) 1690.78,5774.22 Q1.4 1770,6035 1830,6035 1869.53,6074.53 3836.84,6074.53 3881.37,6030 D6.1 3948.74,6030 3991.43,5987.31 5031.83,5987.31 5050,5969.14 D4.1 5050,5281.37 5094.53,5236.84 5094.53,3782.96 4872.5,3560.93 4872.5,3427.5 4976.18,3323.82 D5.1 5070,3261.37 5114.53,3216.84 5114.53,2933.71 5084.53,2903.71 5084.53,2108.35 D7.1
  Bottom Layer w10: v1(1102.82,4454.22) 1877.82,5229.22 v1(1877.82,5774.22)
LED_POWER: R28.2 R29.2 R30.2 R31.2 R32.2 R33.2 R34.2 R35.2 R36.2 | length 14267.9
  Top Layer w10: R31.2 R31.2@976.3,1558.39 ; v1(1130,4935) 980,4785 R29.2 980,4624.69 989.08,4615.61 1014.47,4615.61 1155,4475.07 1155,2866.77 999.84,2711.61 R30.2 990,1572.09 R31.2@976.3,1558.39 ; v1(1200,5025) 1200,5134.65 1314.45,5249.09 R28.2 1314.45,5366.61 1622.84,5675 1890,5675 2250.91,6035.91 3635.71,6035.91 R34.2 3641.61,6020.16 3723.54,5938.23 4926.77,5938.23 4995,5870 4995,5109.93 5015.54,5089.39 5040.92,5089.39 5050,5080.31 R32.2 5040.16,5046.61 5026.46,5032.91 5026.46,3743.17 4840,3556.72 4840,3546.81 cw(c4795,3540) 4840,3533.19 4840,3447.44 ccw(c4850,3447.52) 4840.08,3446.24 cw(c4795,3440) 4840.09,3433.8 ccw(c4850,3432.48) 4840,3432.52 4840,3410 4865,3385 4865,3190 5028.39,3026.61 R33.2 5070,2917.46 5015.47,2862.94 5015.47,1816.3 5050.16,1781.61 R35.2 ; R36.2 2451.61,954.84 1848.07,1558.39 R31.2@976.3,1558.39
  Bottom Layer w10: v1(1130,4935) 1196.17,5001.17 1196.17,5021.17 v1(1200,5025)
MANUAL_START: SW1.4 U1.10 | length 1914.5
  Top Layer w10: v1(2815,3545) 3035,3545 3073.58,3506.42 SW1.4
  Bottom Layer w10: U1.10 2815,4925 v1(2815,3545)
MIC+: C2.1 J9.1 R18.1 | length 3054.6
  Top Layer w10: J9.1 3705,2892.8 3705,4670.55 R18.1 3649.92,4735.47 C2.1
MIC_READING: C3.1 R23.2 U1.11 | length 2246.5
  Top Layer w10: U1.11 2715.91,4924.09 3562.25,4924.09 3676.7,5038.54 4594.74,5038.54 4647.77,4985.51 4705.04,4985.51 4726.61,4963.94 R23.2 4726.61,4883.86 C3.1
NetC3_2: C3.2 R21.1 | length 82
  Top Layer w10: C3.2 4799.45,4870.08 R21.1
NetC6_1: C6.1 R28.1 U4.3 | length 231.5
  Top Layer w10: C6.1 R28.1 1245.55,5407.58 U4.3
NetD1_2: D1.2 R29.1 | length 72.8
  Top Layer w10: D1.2 R29.1
NetD2_2: D2.2 R30.1 | length 72.8
  Top Layer w10: R30.1 D2.2
NetD3_2: D3.2 R31.1 | length 72.8
  Top Layer w10: D3.2 R31.1
NetD4_2: D4.2 R32.1 | length 72.8
  Top Layer w10: R32.1 D4.2
NetD5_2: D5.2 R33.1 | length 72.8
  Top Layer w10: R33.1 D5.2
NetD6_2: D6.2 R34.1 | length 77.8
  Top Layer w10: R34.1 D6.2
NetD7_2: D7.2 R35.1 | length 77.8
  Top Layer w10: R35.1 D7.2
NetD8_2: D8.2 R36.1 | length 77.8
  Top Layer w10: R36.1 D8.2
NetR1_1: R1.1 SW1.3 | length 110.1
  Top Layer w10: R1.1 3021.42,3057.87 3052.99,3089.45 3052.99,3117.91 SW1.3
NetR5_2: R5.2 U2.1 | length 100
  Top Layer w10: R5.2 U2.1
NetR6_1: R6.1 R9.1 U2.5 | length 217.6
  Top Layer w10: U2.5 4490.55,4895 R9.1 R6.1
NetR7_2: R7.2 U2.2 | length 100.6
  Top Layer w10: R7.2 U2.2
NetR8_1: R8.1 U2.6 | length 100.6
  Top Layer w10: U2.6 R8.1
NetR10_2: R10.2 R13.2 U2.4 | length 214.7
  Top Layer w10: R10.2 R13.2 3964.45,4595 U2.4
NetR11_2: R11.2 U2.3 | length 100.6
  Top Layer w10: R11.2 U2.3
NetR12_1: R12.1 U2.7 | length 102.6
  Top Layer w10: U2.7 4470.55,4695 R12.1
NetR14_1: R14.1 U2.8 | length 100.6
  Top Layer w10: U2.8 R14.1
NetR15_2: R15.2 R16.1 U3.5 | length 180.4
  Top Layer w10: U3.5 4217.2,4392.4 4234.61,4375 R16.1 R15.2
NetR19_2: R19.2 U3.3 | length 258.3
  Top Layer w10: U3.3 4137.4,4317.6 4190,4265 4211.84,4265 4277.91,4198.93 4277.91,4187.64 R19.2
NetR20_1: R20.1 U3.1 | length 142.1
  Top Layer w10: U3.1 4114.84,4392.4 4147.78,4425.33 4165.69,4425.33 4209.45,4469.09 R20.1
NetR22_2: R22.2 U3.4 | length 111.4
  Top Layer w10: U3.4 4253.86,4317.6 4295.55,4275.91 R22.2
NetR25_2: R25.2 R27.1 U3.2 | length 278.3
  Top Layer w10: U3.2 4098.19,4348.19 4082.09,4348.19 4068.35,4334.45 4068.35,4273.11 4125.55,4215.91 R25.2 R27.1
OP_AMP+: C4.2 R11.1 R14.2 R19.1 R24.1 R26.2 | length 2037
  Top Layer w10: R11.1 3845,4695 3800,4650 3800,4378.16 4118.16,4060 4325,4060 4370,4105 4370,4158.54 4364.45,4164.09 R19.1 ; R14.2 4545,4594.45 v1(4545,4530) 4548.83,4526.17 4556.15,4526.17 4618.39,4463.94 R24.1 4618.39,4383.86 C4.2 4609.53,4302.24 R26.2
  Bottom Layer w10: v1(4360,4095) 4545,4280 v1(4545,4530)
OP_AMP-: C1.1 C2.2 R7.1 R12.2 R17.2 R22.1 | length 2571.8
  Top Layer w10: R17.2 3730.08,4865.55 C1.1 C2.2 3905.08,4794.53 R7.1 3905.55,4789.09 3775,4658.54 3775,4374.87 4109.87,4040 4347.43,4040 4402.09,4094.66 4402.09,4222.91 4396.77,4228.23 ; R22.1 4364.45,4264.09 4398.54,4230 4645,4230 4680,4265 4680,4554.45 4567.99,4666.46 4562.09,4666.46 4544.45,4684.09 R12.2
OP_AMP_OUT: C1.2 R5.1 R8.2 R17.1 R20.2 R21.2 | length 1624.6
  Top Layer w10: R17.1 3649.92,4929.53 C1.2 3742.87,4929.53 3777.4,4895 R5.1 3906.1,4900.91 3945.71,4940.51 4111.73,4940.51 4140.55,4911.69 ; R20.2 4140.55,4911.69 ; R21.2 R8.2 4544.45,4800.91 4495.87,4849.49 4202.75,4849.49 4140.55,4911.69
PHOTOTRANSISTOR_F: J7.2 R3.2 U1.8 | length 5832.5
  Top Layer w10: U1.8 2475,5075 2475,1537.76 2885.26,1127.5 3052.81,1127.5 3250.31,930 R3.2 4115,942.56 J7.2
PHOTOTRANSISTOR_L: J6.2 R2.2 U1.7 | length 3751.7
  Top Layer w10: J6.2 1342.44,2315 R2.2 1362.91,2302.44 2435,3374.53 2435,5160 2635.09,5360.09 2660.09,5360.09 U1.7
PHOTOTRANSISTOR_R: J8.2 R4.2 U1.6 | length 4205.4
  Top Layer w10: U1.6 2750,5470 2813.79,5406.21 v1(2876.21,5406.21) ; v1(4645,2430) 4645,2315.96 R4.2 4659.3,2300.63 4691.87,2300.63 J8.2
  Bottom Layer w10: v1(2876.21,5406.21) 2880,5402.43 2880,5219.79 3090,5009.79 3090,4450.21 4645,2895.21 v1(4645,2430)
R_MOTOR_FEEDBACK: J5.2 U1.4 | length 4414.4
  Bottom Layer w10: U1.4 2515,5515 2515,3669.11 2795,3389.11 2795,1655 J5.2
R_MOTOR_PWM: J4.3 U1.23 | length 4935.1
  Top Layer w10: J4.3 2100.04,1477.32 2100.04,1464.96 2135,1430 2293.97,1430 2330,1466.03 2330,1767.36 2455,1892.36 2455,5119.92 2650.99,5315.91 3224.09,5315.91 U1.23
SCK: P6.2 U1.1 | length 201.4
  Top Layer w10: P6.2 2570,5870 U1.1
ULTRASONIC_TRIGGER: P1.3 P2.3 P3.3 P4.3 U1.25 | length 11268.8
  Top Layer w10: v1(2610,3520) 2666.68,3576.68 v1(3195.78,3576.68) ; U1.25 3490,5070 4120,5700 P4.3 4865,5630 4865,3610 P3.3 4758.32,3576.68 3856.68,3576.68 v1(3855,3575)
  Bottom Layer w10: v1(2610,3520) 2535,3445 P2.3 1159.49,3399.49 1159.49,2160.51 2115.51,1204.49 2999.49,1204.49 P1.3 ; v1(3195.78,3576.68) 3196.62,3575.84 3854.16,3575.84 v1(3855,3575)
VIN: SW2.1 U1.15 | length 4170.8
  Top Layer w10: U1.15 2670,4162.39 v1(3555.05,3277.35) ; v1(4755,1385) 4756.32,1383.68 4874.78,1383.68 SW2.1
  Bottom Layer w10: v1(3555.05,3277.35) 4755,2077.39 v1(4755,1385)
pads on no net: MH1. MH2. MH3. SW1.1 SW2. SW2.3 SW2.4 SW2.5 SW2.6 SW2.7 U1.3 U1.13 U1.28 U1.29 U1.30
copper on no net:
  other v1: 4615,4945

## Polygon pours and split planes (outlines as drawn)
GND on Top Layer "GND_L01_P000" (solid, pour order 0): 875,1000 875,6000 cw(c1000,6000) 1000,6125 5000,6125 cw(c5000,6000) 5125,6000 5125,1000 cw(c5000,1000) 5000,875 1000,875 cw(c1000,1000)

## Silkscreen, mask and mechanical layers (free items; w line width, h text height)
Top Overlay:
  lines w10: 875,1000 ccw(c1000,1000) 1000,875 5000,875 ccw(c5000,1000) 5125,1000 5125,6000 ccw(c5000,6000) 5000,6125 1000,6125 ccw(c1000,6000) 875,6000 875,1000 ; 3750,4445 4000,4445 4000,4635 3750,4635 3750,4445 ; 3985,4075 4235,4075 4235,4265 3985,4265 3985,4075 ; 4250,4320 4500,4320 4500,4510 4250,4510 4250,4320 ; 4450,4850 4685,4850 4685,5045 4450,5045 4450,4850
  text "3.3V" at 2325,5955 h30
  text "SCK" at 2355,5850 h30
  text "GND" at 2355,5750 h30
  text "RF Trans / this side" at 3510,5725 h60
  text "MANUAL START" at 2245,3590 h120
  text "COLLECTOR" at 4825,2310 h30
  text "EMITTER" at 960,2295 h30
  text "EMITTER" at 4830,2210 h30
  text "COLLECTOR" at 900,2195 h30
  text "6V" at 1965,1940 h30
  text "GND" at 3986.88,1931.61 h30
  text "RED" at 2880,1910 h30
  text "BLUE" at 3005,1910 h30
  text "GND" at 1935,1800 h30
  text "9V" at 3990,1795 h30
  text "GND" at 2250,1690 h30 r270
  text "GND" at 3910,1690 h30 r270
  text "PWM" at 2050.43,1687.8 h30 r270
  text "VCC" at 2150.51,1688.42 h30 r270
  text "PWM" at 3710.43,1687.8 h30 r270
  text "VCC" at 3810.51,1688.42 h30 r270
  text "RIGHT_FEEDBACK" at 2450,1475 h30
  text "LEFT_FEEDBACK" at 3165,1475 h30
  text "VIN" at 4655,1440 h60
  text "9V / USB" at 5110,1350 h30 r90
  text "A5" at 4970,1150 h30
  text "US Sensor" at 2865,1135 h30
  text "EMITTER" at 4135,1105 h30 r90
  text "COLLECTOR" at 4235,1105 h30 r90
  text "5V" at 4964.57,1052.44 h30
  text "GND" at 4965,951.04 h30

## Text inside footprints (layer, text, board x,y; h text height)
U1: Top Overlay "USB / This / Side" at 2865.03,5720 h30